# Altium PCB PCBjosep.PcbDoc
Units mm, origin at the board's own origin, x right, y up, seen from the top; angles counter-clockwise.
Board outline 59.56 x 58.04 mm, 2 copper layers (Top Layer, Bottom Layer); 36 components, 22 nets, 140 pads, 18 vias.
Unrouted connection lines stored in the file: 1.
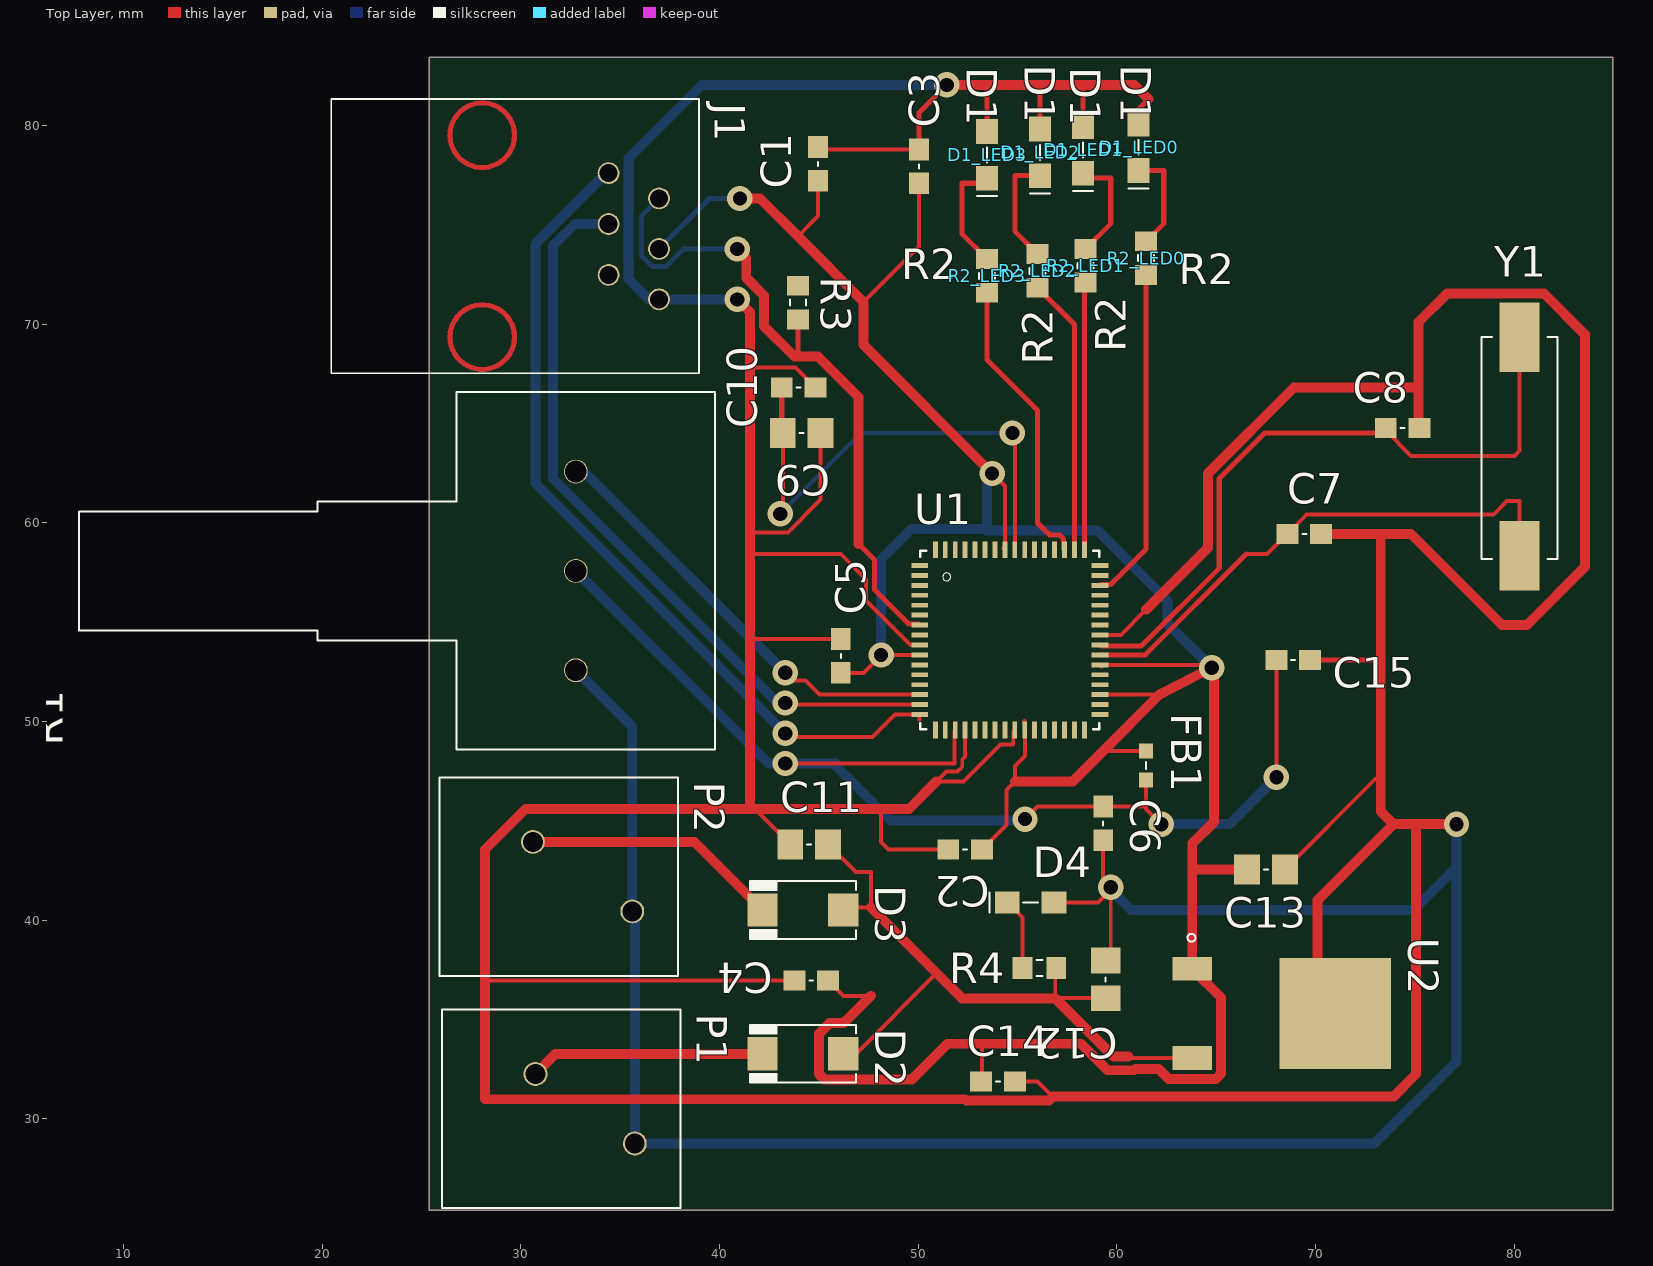
[diagram p0: Top Layer view]
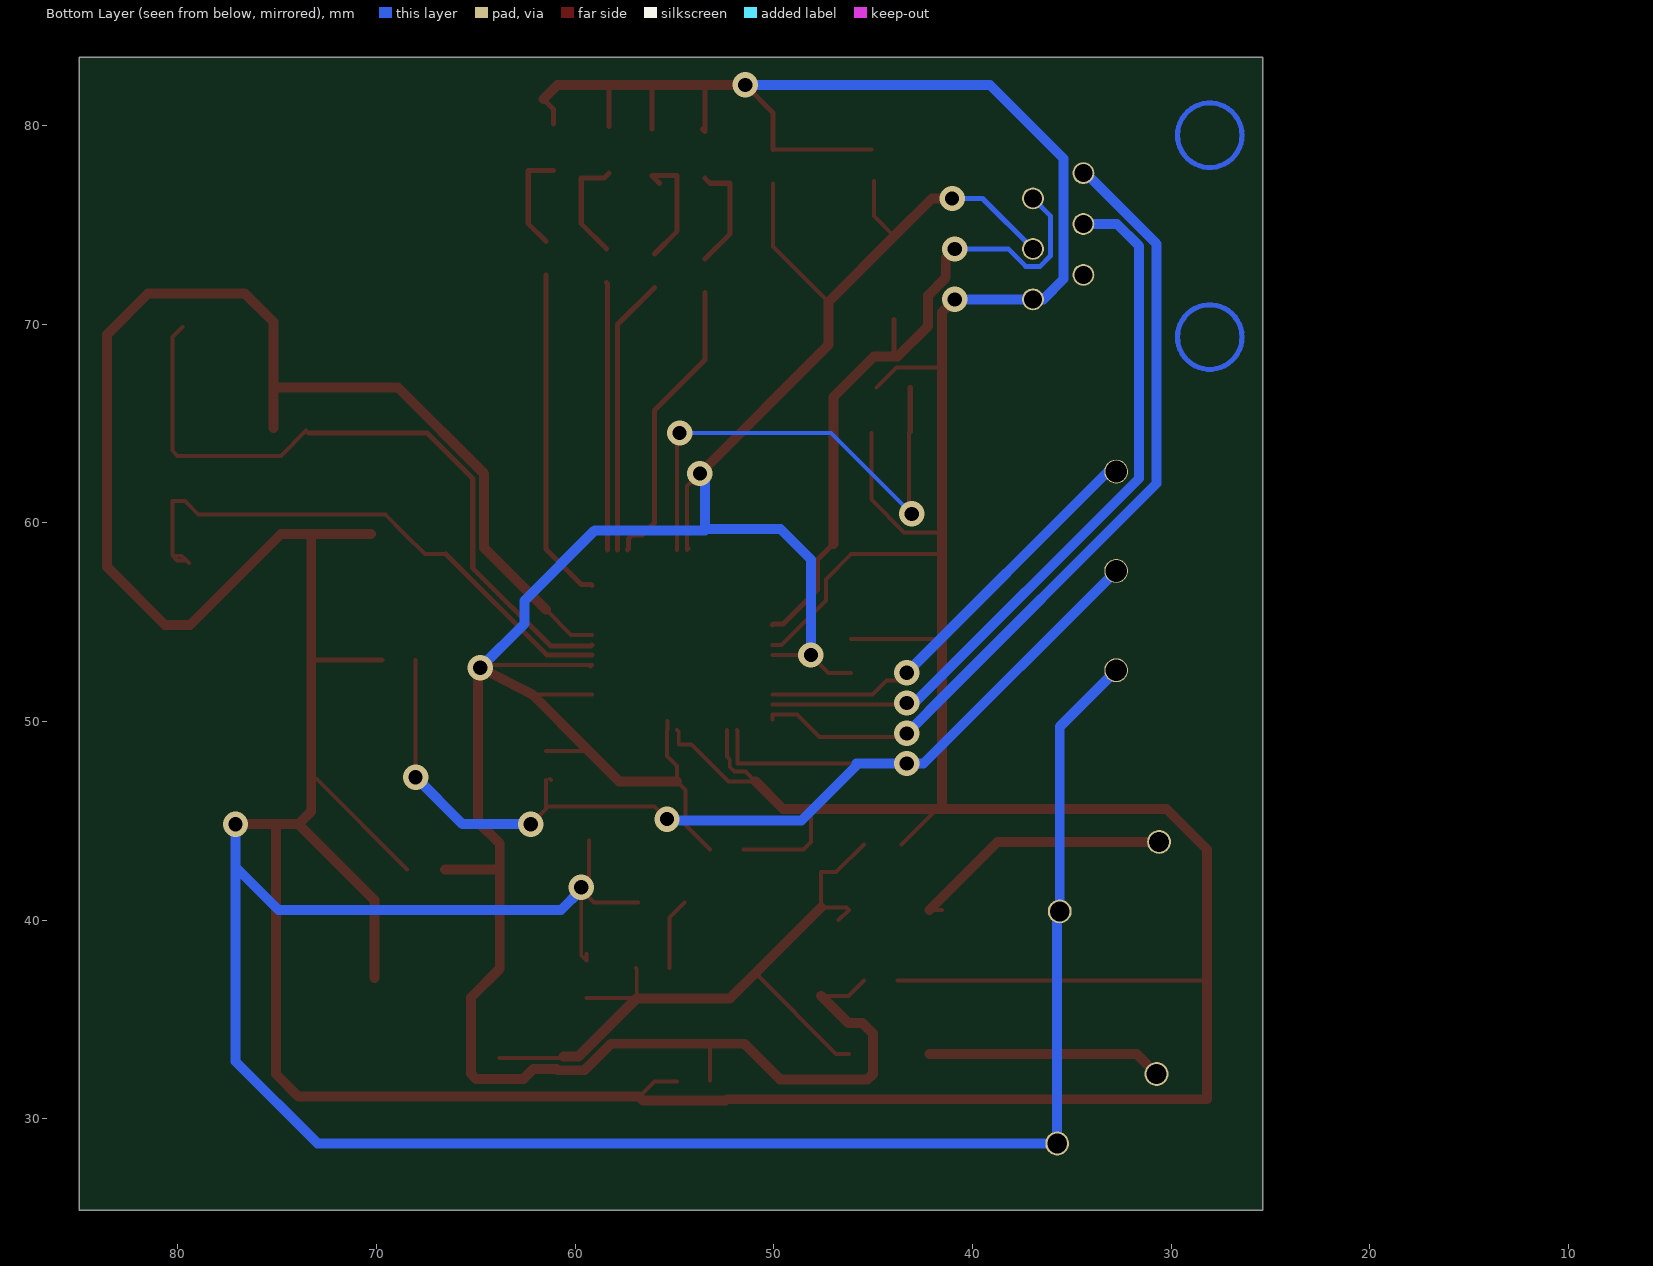
[diagram p1: Bottom Layer view, seen from below]

## Layer stack, top to bottom
Top Solder: solder mask 0.0102, Solder Resist, Dk 3.5
Top Layer: signal copper 0.0356
Dielectric 1: dielectric 0.32, FR-4, Dk 4.8
Bottom Layer: signal copper 0.0356
Bottom Solder: solder mask 0.0102, Solder Resist, Dk 3.5

## Board outline
25.4,25.4 84.963,25.4 84.963,83.439 25.4,83.439

## Design rules (kind name [scope] priority, off if disabled: settings)
Clearance [All] p1: gap=0.2
HoleSize [All] p1: absolutevalues=TRUE maxlimit=2.54 minlimit=0.3 maxpercent=80.000 minpercent=20.000
MinimumSolderMaskSliver [All] p1 off: minsoldermaskwidth=0.254
PolygonConnect [All] p1: connectstyle=Relief reliefconductorwidth=0.254 reliefentries=4 polygonreliefangle="90 Angle" airgapwidth=0.254
RoutingVias [All] p1: holewidth=0.711 width=1.27 viastyle="Through Hole" minholewidth=0.3 minwidth=1.27 maxholewidth=0.711 maxwidth=1.27
SilkToBoardRegionClearance [All] p1 off:
SilkToSolderMaskClearance [IsPad] p1 off: minsilkscreentomaskgap=0.254 clearancetoexposedcopper=TRUE
SolderMaskExpansion [All] p1: expansion=0.102
UnpouredPolygon [All] p1: allowunpoured=FALSE
Width ALIMENT [All] p1: maxlimit=0.5 minlimit=0.2 preferedwidth=0.254
Width BATTERY [All] p2: maxlimit=0.5 minlimit=0.2 preferedwidth=0.254
Width GND [InNet('GND')] p3: maxlimit=0.5 minlimit=0.2 preferedwidth=0.5
Width [All] p4: maxlimit=0.254 minlimit=0.2 preferedwidth=0.254
25 further rules are at their usual default settings.

## Classes and differential pairs
channel class led: LED0 LED1 LED2 LED3
net class LED[0..3]: LED0 LED1 LED2 LED3
component class PROYECTO_PROBOT: R1
component class POWER: C11 C12 C13 C14 C15 D2 D3 D4 FB1 P1 P2 R4 U2
component class PIC: C1 C2 C3 C4 C5 C6 C7 C8 C9 C10 J1 R3 U1 Y1
component class LED3: D1_LED3 R2_LED3
component class LED2: D1_LED2 R2_LED2
component class LED1: D1_LED1 R2_LED1
component class LED0: D1_LED0 R2_LED0

## Components (designator, comment, footprint, x,y, rotation, side; value= is the part's Value field where it differs from the comment)
C1 "100nF" CAPC1608N 44.958,77.216 r90 top
C2 "100nF" CAPC1608N 53.213,43.561 r180 top
C3 "100nF" CAPC1608N 50.038,77.089 r90 top
C4 "100nF" CAPC1608N 45.466,36.957 r180 top
C5 "100nF" CAPC1608N 46.101,52.451 r90 top
C6 "100nF" CAPC1608N 59.309,45.72 r270 top
C7 "20pF" CAPC1608N 68.58,59.436 r0 top
C8 "20pF" CAPC1608N 73.533,64.77 r0 top
C9 "10uF 4V" CAP2012N 45.085,64.516 r180 top
C10 "1uF 4V" CAPC1608N 44.831,66.802 r180 top
C11 "Comment" CAP2012N 43.561,43.815 r0 top
C12 "Comment" CAP2012N 59.436,37.973 r270 top
C13 "Comment" CAP2012N 68.453,42.545 r180 top
C14 "Comment" CAPC1608N 54.864,31.877 r180 top
C15 "Comment" CAPC1608N 69.723,53.086 r180 top
D1_LED0 "D1" LED_0805 61.087,77.724 r90 top (schematic designator D1)
D1_LED1 "D1" LED_0805 58.293,77.597 r90 top (schematic designator D1)
D1_LED2 "D1" LED_0805 56.134,77.47 r90 top (schematic designator D1)
D1_LED3 "D1" LED_0805 53.467,77.343 r90 top (schematic designator D1)
D2 "GF1A" DO-214AC_21 42.164,33.274 r0 top
D3 "GF1A" DO-214AC_21 42.164,40.513 r0 top
D4 "Green LED" LED_0805 54.483,40.894 r0 top
FB1 "Comment" INDC1608AN 61.468,48.514 r270 top
J1 "Comment" RJ12_90 36.957,76.327 r270 top
P1 "Comment" PHOENIX_1985195 30.734,32.258 r270 top
P2 "Comment" PHOENIX_1985195 30.607,43.942 r270 top
R1 "1K" PDB181-K415K-102A2 32.766,52.578 r90 top
R2_LED0 "R2" RESC1608N 61.468,74.168 r270 top (schematic designator R2)
R2_LED1 "R2" RESC1608N 58.42,73.787 r270 top (schematic designator R2)
R2_LED2 "R2" RESC1608N 56.007,73.533 r270 top (schematic designator R2)
R2_LED3 "R2" RESC1608N 53.467,73.279 r270 top (schematic designator R2)
R3 "4.7K" RESC1608N 43.942,70.231 r90 top
R4 "Comment" RESC1608N 55.245,37.592 r0 top
U1 "PIC32MX764F128H-I/PT" QFP50P1200X1200X120-64 54.61,54.102 r0 top
U2 "" TD03B_N 70.993,35.306 r270 top
Y1 "8MHz" 4H_SMX_CRYSTAL 80.264,69.342 r270 top

## Footprints (in the part's own frame and the unit in brackets; to place one, negate y for a bottom-side part, rotate by r counter-clockwise, add the part's x,y. Pads: shape width x height; smd on the part's side, far side on the other; paste and mask are expansions set on the pad)
4H_SMX_CRYSTAL [mm]
  rect 3.5x2 smd: 1(0,0) 2(11,0)
  silkscreen extent 0,-1.91 11.18,1.91
CAP2012N [mm]
  rect 1.3x1.5 smd: 1(0,0) 2(1.9,0)
  silkscreen extent 0.85,0 1.05,0
CAPC1608N [mm]
  rect 1.1x1 smd: 1(0,0) 2(1.7,0)
  silkscreen extent 0.75,0 0.95,0
DO-214AC_21 [mm]
  rect 1.52x1.68 smd: 1(0,0) 2(4.06,0)
  silkscreen extent -0.64,-1.45 4.7,1.45
INDC1608AN [mm]
  rect 0.75x0.7 smd: 1(0,0) 2(1.45,0)
  silkscreen extent 0.55,0 0.9,0
LED_0805 [mm]
  rect 1.25x1.1 smd: 1(0,0) 2(2.35,0)
  silkscreen extent -0.89,-0.51 1.55,0.51
PDB181-K415K-102A2 [mm]
  round 1.2 hole 1.1: 1(0,0) 2(5,0) 3(10,0)
  silkscreen extent -4,-7 14,25
PHOENIX_1985195 [mm]
  round 1.2 hole 1: 1(0,0) 2(3.5,5)
  silkscreen extent -3.25,-4.7 6.75,7.3
QFP50P1200X1200X120-64 [mm]
  rect 0.84x0.245 smd: 1(-4.535,3.75) 2(-4.535,3.25) 3(-4.535,2.75) 4(-4.535,2.25) 5(-4.535,1.75) 6(-4.535,1.25) 7(-4.535,0.75) 8(-4.535,0.25) 9(-4.535,-0.25) 10(-4.535,-0.75) 11(-4.535,-1.25) 12(-4.535,-1.75) 13(-4.535,-2.25) 14(-4.535,-2.75) 15(-4.535,-3.25) 16(-4.535,-3.75) 33(4.535,-3.75) 34(4.535,-3.25) 35(4.535,-2.75) 36(4.535,-2.25) 37(4.535,-1.75) 38(4.535,-1.25) 39(4.535,-0.75) 40(4.535,-0.25) 41(4.535,0.25) 42(4.535,0.75) 43(4.535,1.25) 44(4.535,1.75) 45(4.535,2.25) 46(4.535,2.75) 47(4.535,3.25) 48(4.535,3.75)
  rect 0.245x0.84 smd: 17(-3.75,-4.535) 18(-3.25,-4.535) 19(-2.75,-4.535) 20(-2.25,-4.535) 21(-1.75,-4.535) 22(-1.25,-4.535) 23(-0.75,-4.535) 24(-0.25,-4.535) 25(0.25,-4.535) 26(0.75,-4.535) 27(1.25,-4.535) 28(1.75,-4.535) 29(2.25,-4.535) 30(2.75,-4.535) 31(3.25,-4.535) 32(3.75,-4.535) 49(3.75,4.535) 50(3.25,4.535) 51(2.75,4.535) 52(2.25,4.535) 53(1.75,4.535) 54(1.25,4.535) 55(0.75,4.535) 56(0.25,4.535) 57(-0.25,4.535) 58(-0.75,4.535) 59(-1.25,4.535) 60(-1.75,4.535) 61(-2.25,4.535) 62(-2.75,4.535) 63(-3.25,4.535) 64(-3.75,4.535)
  silkscreen extent -4.5,-4.5 4.5,4.5
RESC1608N [mm]
  rect 1x1.1 smd: 1(0,0) 2(1.7,0)
  silkscreen extent 0.7,-0.4 1,0.4
RJ12_90 [mm]
  round 1.1 hole 0.9: 1(0,0) 2(2.54,0) 3(5.08,0) 4(-1.27,-2.54) 5(1.29,-2.54) 6(3.85,-2.54)
  Multi-Layer circle w0.254: c6.98,-8.9 r1.625
  Multi-Layer circle w0.254: c-3.18,-8.9 r1.625
  silkscreen extent -5,-16.5 8.8,2
TD03B_N [mm]
  rect 5.6x5.6 smd: 1(0,0)
  rect 1.2x2 smd: 3(2.25,-7.2) 4(-2.25,-7.2)
  silkscreen extent -4.01,-7.44 -3.61,-7.04

## Part data
C1 C2 C3 C4 C5 C6 C7 C8 C9 C10 C11 C12 C13 C14 C15: library part Cap, "Capacitor"
D1_LED0 D1_LED1 D1_LED2 D1_LED3: library part LED0, "Typical INFRARED GaAs LED"
D2 D3: library part Diode, "Default Diode"
D4: library part LED2, "Typical RED, GREEN, YELLOW, AMBER GaAs LED"
FB1: library part Inductor, "Inductor"
J1: library part "Header 6", "Header, 6-Pin"
P1 P2: library part "Header 2H", "Header, 2-Pin, Right Angle"
R1: library part RPot, "Potentiometer"
R2_LED0 R2_LED1 R2_LED2 R2_LED3 R3 R4: library part Res1, "Resistor"
U1: library part Component_1
U2: library part MHDR2X2, "Header, 2-Pin, Dual row"
Y1: library part XTAL, "Crystal Oscillator"

## Via types
v1: diameter 1.27, hole 0.711, Top Layer to Bottom Layer, 18 vias

## Nets (pads, with @x,y where several pads share a name; then routed paths per layer and width w, separated by ;. In a path a pad name is that pad's centre, name@x,y a point inside that pad or via, vN(x,y) a via of type N, cw(c..) or ccw(c..) an arc to the next point about the centre after c; other vN are vias at no path point)
ALIM: D2.1 P1.1 | length 11.9
  Top Layer w0.5: P1.1 31.75,33.274 D2.1
BATTERY: D3.1 P2.1 | length 13.6
  Top Layer w0.2: D3.1@41.529,40.513 D3.1
  Top Layer w0.5: P2.1 38.735,43.942 D3.1
GND: C1.2 C2.2 C3.2 C4.2 C5.2 C6.2 C7.2 C8.2 C9.1 C10.1 C11.1 C12.1 C13.1 C14.1 C15.1 D1_LED0.2 D1_LED1.2 D1_LED2.2 D1_LED3.2 D4.2 J1.3 P1.2 P2.2 R1.1 U1.9 U1.20 U1.25 U1.41 U2.1 | length 464.5
  Top Layer w0.2: 28.448,36.957 C4.2 ; 41.529,67.818 43.815,67.818 C10.1 ; 41.607,54.151 C5.2 ; 41.61,59.517 43.44,59.517 45.085,61.162 C9.1 ; 41.656,58.42 46.101,58.42 47.371,57.15 47.371,56.089 49.608,53.852 U1.9 ; 42.037,45.593 42.037,45.339 C11.1 ; C1.2@45.085,78.789 C3.2 ; 48.133,45.593 48.133,43.942 48.514,43.561 C2.2 ; U1.20 52.36,48.238 52.216,48.094 52.216,47.713 51.982,47.479 51.416,47.479 50.927,46.99 52.283,46.99 54.14,48.847 54.783,48.847 54.783,49.49 U1.25 ; C14.1 56.007,31.877 56.769,31.115 ; D4.2 59.055,40.894 59.69,41.529 59.69,38.227 C12.1 C12.1@59.436,38.291 ; U1.41 60.194,54.352 61.468,55.626 ; C6.2 59.309,41.91 59.563,41.656 v1(59.69,41.656) ; C13.1 73.025,47.117
  Top Layer w0.254: C3.2 50.038,80.645 v1(51.435,82.042) ; 53.467,82.042 D1_LED3.2 D1_LED3.2@53.594,79.82 ; D1_LED2.2 56.134,82.042 ; D1_LED1.2 58.293,82.042 ; D1_LED0.2 61.087,80.821 61.595,81.329 ; C15.1 73.152,53.086
  Top Layer w0.5: v1(40.894,71.247) 41.529,70.612 41.529,67.818 41.529,45.593 ; 50.927,46.99 49.53,45.593 48.133,45.593 42.037,45.593 41.529,45.593 ; v1(51.435,82.042) 53.467,82.042 56.134,82.042 58.293,82.042 60.882,82.042 61.595,81.329 ; 61.468,55.626 64.574,58.732 64.574,62.469 68.907,66.802 75.184,66.802 ; U2.1@70.104,37.084 70.104,41.021 73.914,44.831 ; C7.2 73.279,59.436 ; C8.2@75.184,64.77 75.184,66.802 ; v1(77.089,44.831) 75.057,44.831 ; 41.529,45.593 30.226,45.593 28.194,43.561 28.194,30.988 52.367,30.988 52.428,30.927 56.581,30.927 56.769,31.115 73.914,31.115 75.057,32.258 75.057,44.831 ; 73.279,59.436 73.279,45.466 73.914,44.831 ; 73.279,59.436 74.803,59.436 79.375,54.864 80.645,54.864 83.566,57.785 83.566,69.469 81.493,71.542 76.622,71.542 75.184,70.104 75.184,66.802 ; 73.914,44.831 75.057,44.831
  Bottom Layer w0.2: P2.2 35.607,28.885 P1.2
  Bottom Layer w0.5: R1.1 35.607,49.737 P2.2 35.734,40.315 P1.2 72.954,28.758 77.089,32.893 77.089,42.672 ; v1(40.894,71.247) J1.3 36.433,71.247 35.417,72.263 35.417,78.343 39.116,82.042 v1(51.435,82.042) ; v1@59.69,41.529 60.706,40.513 74.93,40.513 77.089,42.672 ; v1(77.089,44.831) 77.089,42.672
LED0: R2_LED0.2 U1.46 | length 16.9
  Top Layer w0.254: U1.46 59.196,56.902 59.7,56.902 61.468,58.67 R2_LED0.2
LED1: R2_LED1.2 U1.49 | length 13.5
  Top Layer w0.254: U1.49 58.36,72.027 R2_LED1.2
LED2: R2_LED2.2 U1.50 | length 14
  Top Layer w0.254: R2_LED2.2 57.86,69.98 U1.50
LED3: R2_LED3.2 U1.51 | length 14.9
  Top Layer w0.254: R2_LED3.2 53.467,68.199 56.007,65.659 56.007,59.99 56.613,59.384 57.118,59.384 57.31,59.192 57.31,58.687 U1.51
MCLR: J1.1 R3.1 U1.7 | length 33.4
  Top Layer w0.254: 43.942,68.537 R3.1 ; 46.99,58.943 47.798,58.135 47.798,56.624 49.52,54.902 50.025,54.902 U1.7
  Top Layer w0.5: 41.343,73.338 41.343,72.332 42.229,71.446 42.229,69.912 43.773,68.368 44.951,68.368 46.99,66.329 46.99,58.943
  Bottom Layer w0.254: J1.1 36.08,75.45 36.08,73.424 36.594,72.91 37.32,72.91 38.197,73.787 v1(40.894,73.787)
NetD1_LED0_1: D1_LED0.1 R2_LED0.1 | length 5.2
  Top Layer w0.254: D1_LED0.1 62.357,77.724 62.357,75.057 R2_LED0.1
NetD1_LED1_1: D1_LED1.1 R2_LED1.1 | length 5.6
  Top Layer w0.254: D1_LED1.1 58.547,77.343 59.69,77.343 59.69,75.057 R2_LED1.1
NetD1_LED2_1: D1_LED2.1 R2_LED2.1 | length 6.2
  Top Layer w0.254: D1_LED2.1@55.753,77.089 D1_LED2.1 54.864,77.47 54.864,74.676 R2_LED2.1
NetD1_LED3_1: D1_LED3.1 R2_LED3.1 | length 5.7
  Top Layer w0.254: R2_LED3.1 52.197,74.549 52.197,77.089 53.213,77.089 D1_LED3.1
NetD4_1: D4.1 R4.1 | length 3.6
  Top Layer w0.2: D4.1 55.245,40.132 R4.1
NetR1_3: R1.3 U1.14 | length 21
  Top Layer w0.2: v1@43.688,52.07 44.323,52.07 45.041,51.352 U1.14
  Bottom Layer w0.5: R1.3@33.18,62.578 v1(43.307,52.451)
PGC: J1.5 U1.15 | length 38.1
  Top Layer w0.2: v1(43.307,50.927) 43.382,50.852 U1.15
  Bottom Layer w0.5: J1.5 32.72,75.037 31.623,73.94 31.623,62.236 42.932,50.927 v1(43.307,50.927)
PGD: J1.4 U1.16 | length 42.2
  Top Layer w0.2: v1@43.497,49.212 47.688,49.212 48.828,50.352 U1.16 50.075,50.1
  Bottom Layer w0.5: J1.4@34.29,77.597 30.734,74.041 30.734,61.976 42.222,50.488 42.222,50.478 42.858,49.842 42.868,49.842 v1(43.307,49.403)
V3P3: C1.1 C2.1 C3.1 C4.1 C5.1 C13.2 C14.2 FB1.1 J1.2 R3.2 U1.10 U1.26 U1.35 U1.38 U1.57 U2.4 | length 158.2
  Top Layer w0.2: 43.942,74.422 44.958,75.438 C1.1 ; C4.1 46.228,36.195 47.625,36.195 ; C5.1 47.244,52.451 v1(48.133,53.34) U1.10@50.063,53.34 ; 47.244,71.12 50.038,73.914 C3.1 ; C14.2@53.213,31.926 53.213,33.782 ; C2.1 54.437,44.785 54.437,46.563 54.864,46.99 54.864,47.752 55.372,48.26 55.372,49.555 U1.26 55.36,50.034 ; v1(53.721,62.484) 54.36,61.845 U1.57 U1.57@54.283,58.715 ; U1.35 62.147,51.352 ; U1.38@59.222,52.775 U1.38 64.623,52.852 v1(64.77,52.705) ; 59.309,48.514 FB1.1
  Top Layer w0.5: v1(41.021,76.327) 42.037,76.327 43.942,74.422 47.244,71.12 47.244,68.961 v1(53.721,62.484) ; 47.625,36.195 46.244,34.814 45.527,34.814 45.014,34.3 45.014,32.248 45.278,31.984 49.677,31.984 51.475,33.782 53.213,33.782 58.192,33.782 59.527,32.447 60.869,32.447 60.928,32.506 62.107,32.506 62.607,32.006 64.979,32.006 65.243,32.27 65.243,36.106 U2.4 63.793,43.854 64.897,44.958 v1@64.897,52.578 ; 54.864,46.99 57.785,46.99 59.309,48.514 62.147,51.352 v1(64.77,52.705) ; 63.92,42.545 C13.2
  Bottom Layer w0.2: v1(64.77,52.705) v1@64.897,52.578
  Bottom Layer w0.254: J1.2 39.497,76.327 v1(41.021,76.327)
  Bottom Layer w0.5: v1(48.133,53.34) 48.133,58.156 49.667,59.69 53.398,59.69 ; v1@53.467,62.23 53.467,59.621 59.007,59.621 62.553,56.075 62.553,54.922 v1(64.77,52.705)
V3P3A: C6.1 C15.2 FB1.2 R1.2 U1.19 | length 59.8
  Top Layer w0.2: v1(43.307,47.879) 47.371,47.879 51.816,47.879 51.816,49.523 U1.19 ; v1(55.372,45.085) 56.007,45.72 C6.1 61.341,45.72 ; FB1.2@61.214,47.064 FB1.2@61.267,47.117 ; FB1.2 61.468,45.593 v1(62.23,44.831) ; v1(68.023,47.195) C15.2
  Bottom Layer w0.2: v1(62.23,44.831) v1@62.279,44.782
  Bottom Layer w0.5: R1.2 42.465,47.879 45.847,47.879 ; 45.733,47.892 48.609,45.016 55.303,45.016 v1(55.372,45.085) ; v1(62.23,44.831) 65.659,44.831 v1(68.023,47.195)
V5: C11.2 C12.2 D2.2 D3.2 R4.2 U2.3 | length 36.3
  Top Layer w0.2: C11.2 46.858,42.418 47.625,42.418 47.625,40.64 46.351,40.64 D3.2 D3.2@46.732,40.005 ; D2.2 46.863,33.274 50.927,37.338 ; 56.896,36.068 56.896,37.543 R4.2 ; 56.901,36.073 C12.2 ; 60.67,33.056 U2.3
  Top Layer w0.5: 47.625,40.64 50.927,37.338 52.197,36.068 56.896,36.068 59.817,33.147 60.579,33.147
VCAP: C9.2 C10.2 U1.56 | length 25.7
  Top Layer w0.2: v1(43.053,60.452) 43.185,60.584 C9.2 ; v1(54.737,64.516) 54.864,64.389 54.864,58.641 U1.56
  Top Layer w0.254: C9.2@43.131,64.57 C10.2
  Bottom Layer w0.2: v1(43.053,60.452) 47.117,64.516 v1(54.737,64.516)
X1: C7.1 U1.39 Y1.2 | length 28.8
  Top Layer w0.2: 66.494,58.42 67.564,58.42 C7.1 69.55,60.406 78.948,60.406 79.629,61.087 80.264,61.087 Y1.2 ; Y1.2@79.436,57.973 Y1.2@79.568,58.105 ; Y1.2@79.568,58.105 79.805,58.342 Y1.2 ; Y1.2@79.568,58.105 80.027,58.105 Y1.2
  Top Layer w0.254: U1.39 61.426,53.352 66.494,58.42
X2: C8.1 U1.40 Y1.1 | length 35.2
  Top Layer w0.2: C8.1@73.533,64.643 74.803,63.373 80.01,63.373 80.264,63.627 Y1.1 Y1.1@79.756,69.85
  Top Layer w0.254: U1.40 59.191,53.806 61.238,53.806 65.151,57.719 65.151,62.23 67.437,64.516 C8.1@73.406,64.516
pads on no net: J1.6 U1.1 U1.2 U1.3 U1.4 U1.5 U1.6 U1.8 U1.11 U1.12 U1.13 U1.17 U1.18 U1.21 U1.22 U1.23 U1.24 U1.27 U1.28 U1.29 U1.30 U1.31 U1.32 U1.33 U1.34 U1.36 U1.37 U1.42 U1.43 U1.44 U1.45 U1.47 U1.48 U1.52 U1.53 U1.54 U1.55 U1.58 U1.59 U1.60 U1.61 U1.62 U1.63 U1.64

## Polygon pours and split planes (outlines as drawn)
no net on Top Layer "Top Layer-No Net" (solid, remove dead copper, shelved, pour order 5): 25.4,83.439 84.963,83.439 84.963,25.4 25.4,25.4
GND on Multi-Layer "Top Layer-No Net" (solid, remove dead copper, shelved): 25.4,83.439 25.4,25.4 84.963,25.4 84.963,83.439

## Silkscreen, mask and mechanical layers (free items; w line width, h text height)
Mechanical 3:
  the board outline again, w0.5
Drill Drawing:
  circle w0.025: c13.178,89.916 r0.635
  lines w0.025: 12.543,93.408 12.861,93.408 13.178,93.091 13.496,93.408 13.813,93.408 13.496,93.726 13.813,94.043 13.496,94.043 13.178,94.361 12.861,94.043 12.543,94.043 12.861,93.726 12.543,93.408 ; 12.543,98.171 13.813,98.171 13.178,96.901 12.543,98.171 ; 12.543,100.711 13.813,100.711 13.813,101.981 12.543,101.981 12.543,100.711
  lines w0.381: 10.813,88.138 109.339,88.138 ; 10.813,103.378 109.339,103.378 ; 24.805,84.328 24.805,107.188 ; 42.53,84.328 42.53,107.188 ; 76.708,84.328 76.708,107.188 ; 89.557,84.328 89.557,107.188 ; 10.813,84.328 109.339,84.328 109.339,107.188 10.813,107.188 10.813,84.328
  text "Symbol" at 13.099,104.521 h1.83
  text "Hit Count" at 25.948,104.521 h1.83
  text "Finished Hole Size" at 43.673,104.521 h1.83
  text "Plated" at 77.851,104.521 h1.83
  text "Hole Type" at 90.7,104.521 h1.83
  text "3" at 25.948,100.711 h1.52
  text "43.31mil (1.100mm)" at 43.673,100.711 h1.52
  text "PTH" at 77.851,100.711 h1.52
  text "Round" at 90.7,100.711 h1.52
  text "4" at 25.948,96.901 h1.52
  text "39.37mil (1.000mm)" at 43.673,96.901 h1.52
  text "PTH" at 77.851,96.901 h1.52
  text "Round" at 90.7,96.901 h1.52
  text "6" at 25.948,93.091 h1.52
  text "35.43mil (0.900mm)" at 43.673,93.091 h1.52
  text "PTH" at 77.851,93.091 h1.52
  text "Round" at 90.7,93.091 h1.52
  text "18" at 25.948,89.281 h1.52
  text "28.00mil (0.711mm)" at 43.673,89.281 h1.52
  text "PTH" at 77.851,89.281 h1.52
  text "Round" at 90.7,89.281 h1.52
  text "31 Total" at 25.948,85.471 h1.52

## Dimensions
25.4,83.439 to 25.4,25.4 on Mechanical 1
25.4,25.4 to 84.963,25.4 on Mechanical 1